# Altium PCB nanobase1.PcbDoc
Units mil, origin at the board's own origin, x right, y up, seen from the top; angles counter-clockwise.
Board outline 2320.85 x 1116.57 mil, 2 copper layers (Top Layer, Bottom Layer); 22 components, 41 nets, 144 pads, 31 vias.
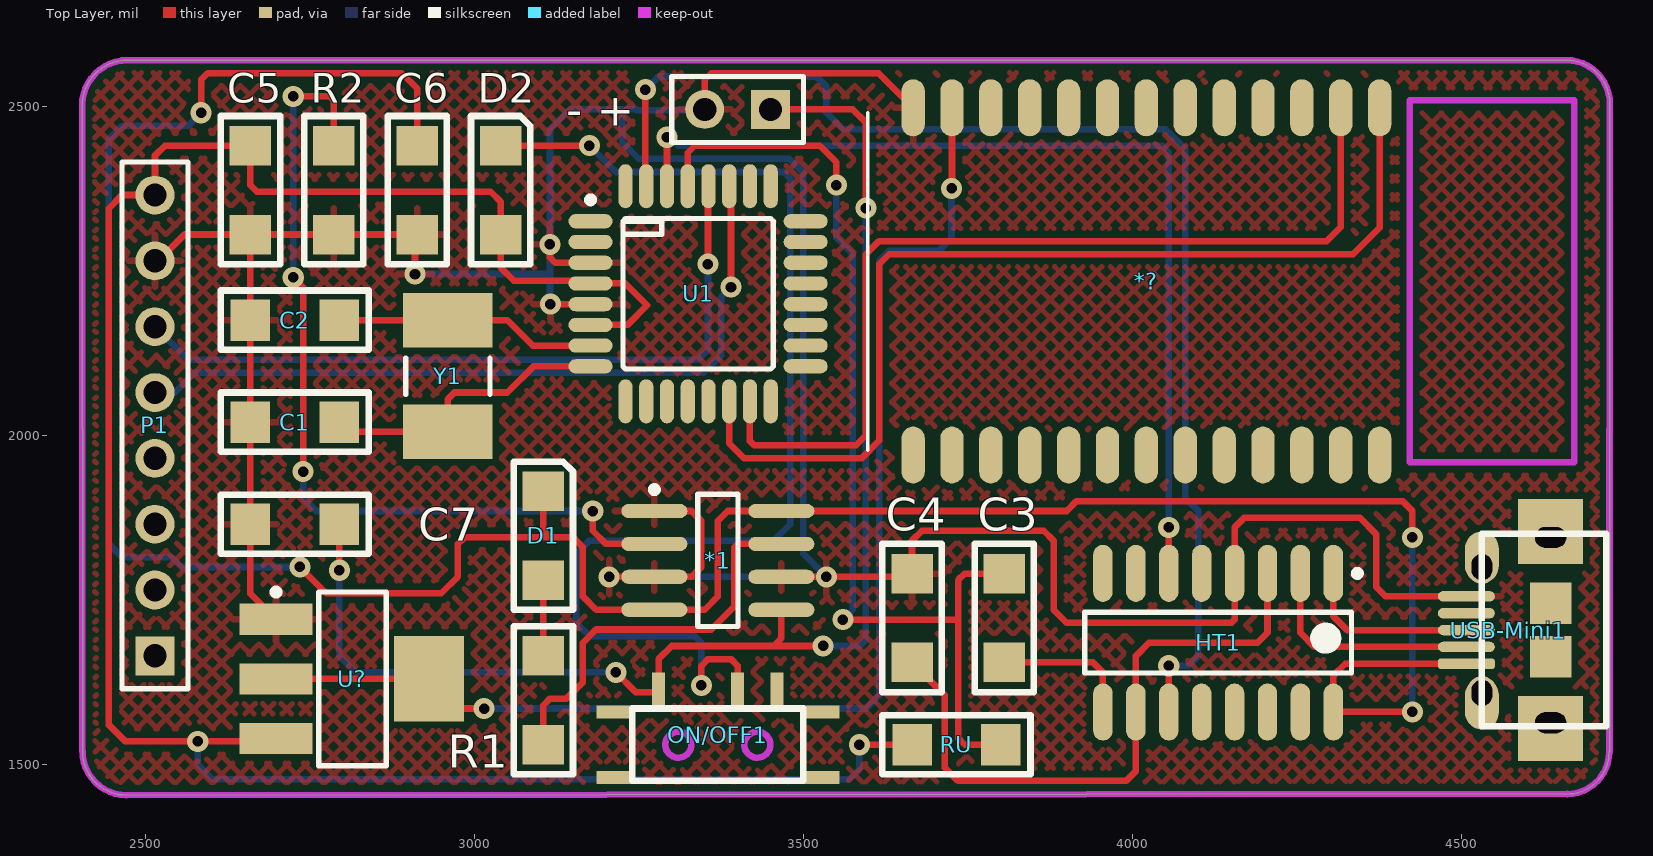
[diagram p0: Top Layer view]
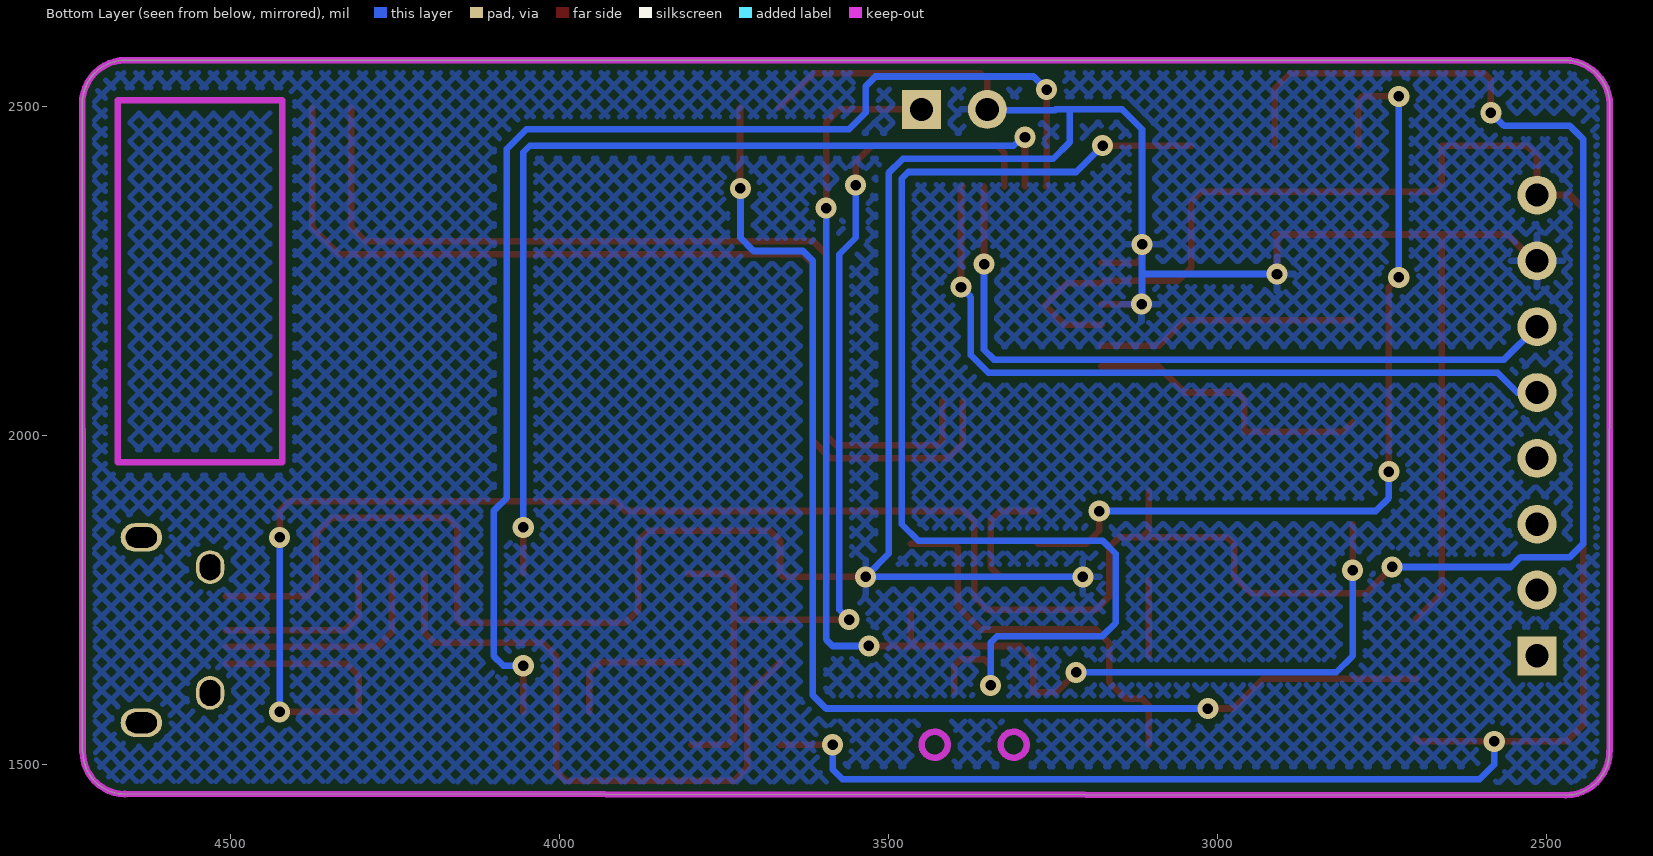
[diagram p1: Bottom Layer view, seen from below]
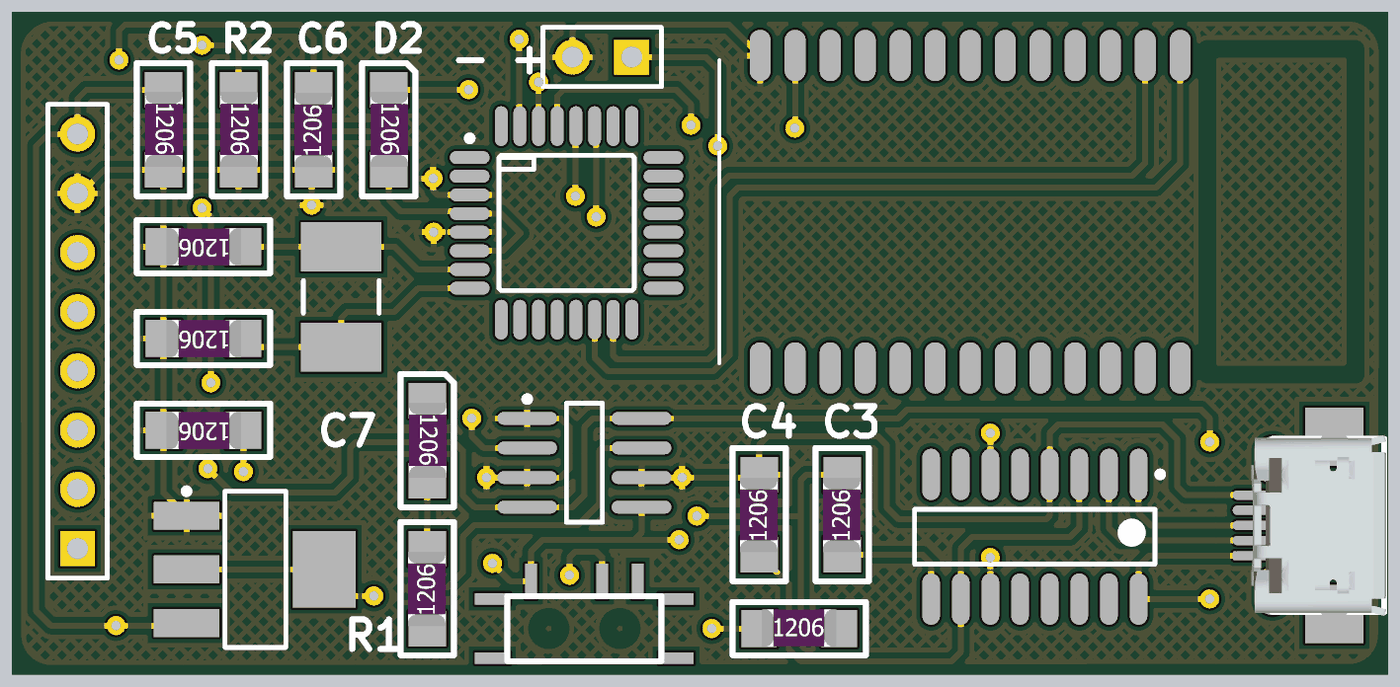
[diagram p2: 3D render of the assembled board from above, using the file's embedded part models]

## Layer stack, top to bottom
Top Solder: solder mask 0.4, Solder Resist, Dk 3.5
Top Layer: signal copper 1.4
Dielectric 1: dielectric 12.6, FR-4, Dk 4.8
Bottom Layer: signal copper 1.4
Bottom Solder: solder mask 0.4, Solder Resist, Dk 3.5

## Board outline
2405,1520 ccw(c2471.45,1519.88) 2471.33,1453.43 4660,1455.41 4660,1455 ccw(c4659.88,1518.96) 4723.84,1519.08 4724.48,1519.08 4725.11,2503.51 4725.11,2503.43 ccw(c4658.66,2503.55) 4658.78,2570 2473.8,2570 2473.67,2570 ccw(c2473.8,2500.46) 2404.26,2500.33 2404.26,2500.42

## Design rules (kind name [scope] priority, off if disabled: settings)
Clearance [All] p1: gap=10 ignorepadtopadclearanceinfootprint=FALSE except(0: Arc-Hole Track-Hole SMDPad-Hole THPad-Hole Via-Hole Fill-Hole Poly-Hole Region-Hole Text-Hole)
PolygonConnect [All] p1: connectstyle=Relief reliefconductorwidth=10 reliefentries=4 polygonreliefangle="90 Angle" airgapwidth=10
RoutingVias [All] p1: holewidth=28 width=50 viastyle="Through Hole" minholewidth=28 minwidth=50 maxholewidth=28 maxwidth=50
SolderMaskExpansion [All] p1: expansion=4
Width [All] p1: maxlimit=10 minlimit=10 preferedwidth=10
30 further rules are at their usual default settings.

## Components (designator, comment, footprint, x,y, rotation, side; value= is the part's Value field where it differs from the comment)
*1 "TP4056" SOP_8 3370,1810 r0 top
*? "HC05" "HC-05 天线" 4035.94,2213.78 r180 top
"- +" "Battery" HDR1X2 3450,2495 r180 top (schematic designator BT1)
C1 "Cap" 1206z 2795,2020 r180 top value=20p
C2 "Cap" 1206z 2795,2175 r180 top value=20p
C3 "Cap" 1206z 3805,1655 r90 top value=100nF
C4 "Cap" 1206z 3665,1655 r90 top value=0.1uf
C5 "Cap" 1206z 2660,2440 r270 top value=100pF
C6 "Cap" 1206z 2913.33,2305 r90 top value=10uf
C7 "Cap" 1206z 2795,1865 r180 top value=10uf
D1 "LED" 1206_极性 3105,1915 r270 top
D2 "Diode" 1206_极性 3040,2440 r270 top
HT1 "HT42B534-16" SOP_16 4130,1685 r270 top
ON/OFF1 "POWER" Switch1 3290,1575 r90 top
P1 "MPU6050" HDR1X8 2515,1665 r90 top
R1 "Resistor" 1206z 3105,1530 r90 top value=1K9
R2 "Resistor" 1206z 2786.67,2440 r270 top value=2K
RU "RES" 1206z 3665,1530 r0 top (schematic designator RU1)
U1 "ATMEGA328P" TQFP_32_短PIN 3340,2215 r0 top
U? "AMS1117" SOT_223 2815,1630 r0 top
USB-Mini1 "J2" USB-MicroDIP4 4625.16,1704.15 r90 top
Y1 "XTAL" XTAL_5032_2PIN 2960,2090 r270 top

## Footprints (in the part's own frame and the unit in brackets; to place one, negate y for a bottom-side part, rotate by r counter-clockwise, add the part's x,y. Pads: shape width x height; smd on the part's side, far side on the other; paste and mask are expansions set on the pad)
1206_极性 [mil]
  rect 60x63 smd: 1(0,0) 2(135,0)
  silkscreen extent -45,-45 180,45, body extent 4,-31 130,32, height 23
1206z [mil]
  rect 60x63 smd: 1(0,0) 2(135,0)
  silkscreen extent -45,-45 180,45, body extent 4,-31 130,32, height 23
"HC-05 天线" [mm]
  oval 0.9x2.2 smd: 1(-8.619,-7.208) 2(-7.119,-7.208) 3(-5.619,-7.208) 4(-4.119,-7.208) 5(-2.619,-7.208) 6(-1.119,-7.208) 7(0.381,-7.208) 8(1.881,-7.208) 9(3.381,-7.208) 10(4.881,-7.208) 11(6.381,-7.208) 12(7.881,-7.208) 13(9.381,-7.208) 22(9.381,6.192) 23(7.881,6.192) 24(6.381,6.192) 25(4.881,6.192) 26(3.381,6.192) 27(1.881,6.192) 28(0.381,6.192) 29(-1.119,6.192) 30(-2.619,6.192) 31(-4.119,6.192) 32(-5.619,6.192) 33(-7.119,6.192) 34(-8.619,6.192)
  Keep-Out Layer lines w0.254: -9.779,6.477 -9.779,-7.493 -16.129,-7.493 -16.129,6.477 -9.779,6.477
  silkscreen extent 11.13,-7.01 11.13,5.99
HDR1X2 [mm] "Connector; Header; 2 Position"
  rect 1.5x1.5 hole 0.9: 1(0,0)
  round 1.5 hole 0.9: 2(2.54,0)
  silkscreen extent -1.27,-1.27 3.81,1.27
HDR1X8 [mm] "Connector; Header; 8 Position"
  rect 1.5x1.5 hole 0.9: 1(0,0)
  round 1.5 hole 0.9: 2(2.54,0) 3(5.08,0) 4(7.62,0) 5(10.16,0) 6(12.7,0) 7(15.24,0) 8(17.78,0)
  silkscreen extent -1.27,-1.27 19.05,1.27
SOP_8 [mm]
  oval 2.55x0.55 smd: 1(-2.45,1.905) 2(-2.45,0.635) 3(-2.45,-0.635) 4(-2.45,-1.905) 5(2.45,-1.905) 6(2.45,-0.635) 7(2.45,0.635) 8(2.45,1.905)
  silkscreen extent -2.57,-2.55 0.77,2.85, body extent -2,-2.55 2,2.55, height 1.75
SOP_16 [mm] "SOP 16"
  oval 2.2x0.75 smd: 1(-2.675,4.445) 2(-2.675,3.175) 3(-2.675,1.905) 4(-2.675,0.635) 5(-2.675,-0.635) 6(-2.675,-1.905) 7(-2.675,-3.175) 8(-2.675,-4.445) 9(2.675,-4.445) 10(2.675,-3.175) 11(2.675,-1.905) 12(2.675,-0.635) 13(2.675,0.635) 14(2.675,1.905) 15(2.675,3.175) 16(2.675,4.445)
  silkscreen extent -2.8,-5.15 1.17,5.5, body extent -2.1,-5.15 2.1,5.15, height 1.7
SOT_223 [mm] "SOT223, 4-Leads, Body 6.50x7.00mm (avg), Pitch 2.30mm, IPC Low Density"
  rect 2.8x1.2 smd: 1(-2.95,2.3) 2(-2.95,0) 3(-2.95,-2.3)
  rect 2.7x3.3 smd: 2(2.95,0)
  silkscreen extent -3.07,-3.35 1.3,3.47, body extent -1.85,-3.35 1.85,3.35, height 1.8
Switch1 [mm]
  rect 1.5x0.5 smd: 1(0.889,0.254) 2(0.889,-2.794) 3(0.889,-4.318)
  rect 0.5x1.5 smd: 10(-2.413,1.905) 10(-2.413,-5.969) 10(0.127,1.905) 10(0.127,-5.969)
  silkscreen extent -2.54,-5.33 0.25,1.27
TQFP_32_短PIN [mm]
  oval 1.7x0.55 smd: 1(-4.15,2.8) 2(-4.15,2) 3(-4.15,1.2) 4(-4.15,0.4) 5(-4.15,-0.4) 6(-4.15,-1.2) 7(-4.15,-2) 8(-4.15,-2.8) 17(4.15,-2.8) 18(4.15,-2) 19(4.15,-1.2) 20(4.15,-0.4) 21(4.15,0.4) 22(4.15,1.2) 23(4.15,2) 24(4.15,2.8)
  oval 0.55x1.7 smd: 9(-2.8,-4.15) 10(-2,-4.15) 11(-1.2,-4.15) 12(-0.4,-4.15) 13(0.4,-4.15) 14(1.2,-4.15) 15(2,-4.15) 16(2.8,-4.15) 25(2.8,4.15) 26(2,4.15) 27(1.2,4.15) 28(0.4,4.15) 29(-0.4,4.15) 30(-1.2,4.15) 31(-2,4.15) 32(-2.8,4.15)
  silkscreen extent -4.27,-2.9 2.9,3.75, body extent -3.5,-3.5 3.5,3.5, height 1.2
USB-MicroDIP4 [mm] "Micro-USB 5P 卧式直插"
  rect 2.5x2.5 smd: 0(-3.8,-0.25) 6(3.8,-0.25)
  oval 1.1x1.6 hole 0.8 slot 1.2 at 90 deg: 0(-3.575,-0.25) 0(3.575,-0.25)
  oval 2x1.3 smd: 0(-2.84,2.4) 0(2.81,2.4)
  oval 1.3x1.1 hole 0.8 slot 1 at 0 deg: 0(-2.425,2.4) 0(2.427,2.4)
  rect 1.6x1.6 smd: 0(-1.038,-0.25) 0(1.038,-0.25)
  rrect50% 0.4x2.2 smd: 1(-1.3,3)
  oval 0.4x2.2 smd: 2(-0.65,3) 3(0,3) 4(0.65,3) 5(1.3,3)
  silkscreen extent -3.71,-2.4 3.71,2.4, body extent -3.89,-2.48 3.89,3.36, height 2.6
XTAL_5032_2PIN [mm] "5032_CPX_53GB"
  rect 2.1x3.45 smd: 1(-2.15,0) 2(2.15,0)
  silkscreen extent -0.7,-1.63 0.7,1.63, body extent -2.58,-1.68 2.57,1.68, height 1.25

## Part data
"- +": "电池", LatestRevisionDate=17-Jul-2002, LatestRevisionNote="Re-released for DXP Platform.", PackageDescription="Battery; 2 Leads", PackageReference=BAT-2, Published=24-Mar-1999, Publisher="Altium Limited"
C1 C2 C3 C4 C5: "Capacitor", LatestRevisionDate=17-Jul-2002, LatestRevisionNote="Re-released for DXP Platform.", PackageReference=RAD-0.3, Published=8-Jun-2000, Publisher="Altium Limited"
C6 C7: "电容", LatestRevisionDate=17-Jul-2002, LatestRevisionNote="Re-released for DXP Platform.", PackageDescription="Radial Cap, Thru-Hole; 2 Leads; 0.3 in Pin Spacing", PackageReference=RAD-0.3, Published=8-Jun-2000, Publisher="Altium Limited"
D1 D2: "二极管", Published=8-Jun-2000, Publisher="Altium Limited"
  D1: LatestRevisionDate=08-Jul-2005, LatestRevisionNote="Mech Layer 1 removed.", PackageDescription="LED; 2 Leads", PackageReference=LED-1
  D2: Code_JEDEC=DO-214-AB, LatestRevisionDate=17-Jul-2002, LatestRevisionNote="Re-released for DXP Platform.", PackageDescription="DO-214-AB/SMC; 2 C-Bend Leads; Body 7.9 x 5.9 mm, inc. leads (LxW)", PackageReference=SMC, PackageVersion=Sep-1996
HT1: "USB_COM"
ON/OFF1: library part SW2_1, "按键", LatestRevisionDate=17-Jul-2002, LatestRevisionNote="Re-released for DXP Platform.", PackageDescription="Switch; 2 Leads", PackageReference=SPST-2, Published=24-Mar-1999, Publisher="Altium Limited"
P1: library part "Header 8", "Header, 8-Pin", LatestRevisionDate=17-Jul-2002, LatestRevisionNote="Re-released for DXP Platform.", Publisher="Altium Limited"
R1 R2: "电阻", LatestRevisionDate=17-Jul-2002, LatestRevisionNote="Re-released for DXP Platform.", PackageDescription="Axial Device, Thru-Hole; 2 Leads; 0.3 in Pin Spacing", PackageReference=AXIAL-0.3, Published=8-Jun-2000, Publisher="Altium Limited"
RU: library part RES-8P4R
U1: library part atmega328p-au
U?: "稳压"
USB-Mini1: library part USB_MINI
Y1: "Crystal Oscillator", LatestRevisionDate=17-Jul-2002, LatestRevisionNote="Re-released for DXP Platform.", PackageReference=R38, Published=8-Jun-2000, Publisher="Altium Limited"

## Via types
v1: diameter 32, hole 16, Top Layer to Bottom Layer, 31 vias

## Nets (pads, with @x,y where several pads share a name; then routed paths per layer and width w, separated by ;. In a path a pad name is that pad's centre, name@x,y a point inside that pad or via, vN(x,y) a via of type N, cw(c..) or ccw(c..) an arc to the next point about the centre after c; other vN are vias at no path point)
3V3: *?.12 U?.2 | length 1925.8
  Top Layer w10: U?.2@2698.86,1630 2931.14,1630 2976.14,1585 v1(3015,1585) ; v1@3725.67,2374.33 *?.12
  Bottom Layer w10: v1(3015,1585) 3595,1585 3615,1605 3615,2265 3630,2280 3705,2280 3725,2300 v1(3725,2375)
A0: U1.23
A1: U1.24
A2: U1.25
A3: U1.26
A4: P1.5 U1.27 | length 1147.5
  Top Layer w10: U1.27 3390,2375.63 v1(3390,2225)
  Bottom Layer w10: P1.5 2545,2065 2575,2095 3348.28,2095 3375,2121.72 3375,2210 v1(3390,2225)
A5: P1.6 U1.28 | length 1115.6
  Top Layer w10: v1(3355,2260) 3355,2377.64 U1.28
  Bottom Layer w10: P1.6 2565,2115 3340,2115 3355,2130 v1(3355,2260)
A6: U1.19
A7: U1.22
D2: U1.32
D3: U1.1
D4: U1.2
D5: U1.9
D6: U1.10
D7: U1.11
D8: U1.12
D9: U1.13
D10_RX: *?.1 U1.14 | length 1545.8
  Top Layer w10: U1.14 3387.24,1987.76 3410,1965 3588.28,1965 3615,1991.72 3615,2260 3630,2275 4335,2275 4375.28,2315.28 *?.1
D11_TX: *?.2 U1.15 | length 1440.1
  Top Layer w10: U1.15 3418.74,1991.26 3425,1985 3580,1985 3595,2000 3595,2275 3615,2295 4295,2295 4316.22,2316.22 *?.2
D12: U1.16
D13: U1.17
DTR: C3.1 HT1.9 | length 216.5
  Top Layer w10: C3.1 3940,1655 3955,1640 HT1.9
GND: "- +.2" *1.1 *1.3 *1.6 *?.13 C1.2 C2.2 C4.2 C5.2 C6.1 C7.2 HT1.4 P1.7 R2.2 U1.3 U1.5 U?.1 USB-Mini1.5 | length 5388.4
  Top Layer w10: P1.7 2520,2265 2560,2305 C5.2 ; U?.1 2660,1759.41 C7.2 C1.2 C2.2 C5.2 ; v1(2910,2245) 2910,2301.67 C6.1 R2.2 C5.2 ; v1(3115,2290) 3115,2270 3122.76,2262.24 U1.3 ; v1(3115.75,2199.25) U1.5 ; v1(3205,1785) *1.3 3330,1785 3345,1800 3345,1870 3330,1885 *1.1 ; 3350,2495 3350,2540 3360,2550 3614.17,2550 *?.13 ; *1.6 v1(3535,1785) 3660,1785 C4.2 3665,1840 3680,1855 3865,1855 3880,1840 3880,1735 3900,1715 4150,1715 4155,1720 HT1.4 4155,1860 4170,1875 4345,1875 4370,1850 4370,1770 4384.67,1755.33 USB-Mini1.5
  Bottom Layer w10: v1(2910,2245) 3115,2245 ; v1(3115.75,2199.25) 3115,2200 3115,2245 ; v1(3205,1785) v1(3535,1785) 3500,1820 3500,2398.28 3478.28,2420 3250,2420 3225,2445 3225,2495 ; 3350,2495 3349,2494 3247.16,2494 3246.16,2495 3225,2495 ; 3115,2245 v1(3115,2290) 3115,2465 3145,2495 3225,2495
Net*1_2: *1.2 R2.1 | length 1329.1
  Top Layer w10: v1(2725,2240) 2740,2225 v1(2740,1945) ; v1(2725,2515) 2780,2515 2786.67,2508.33 R2.1 ; v1(3180,1885) 3180,1855 3200,1835 *1.2
  Bottom Layer w10: v1(2725,2240) v1(2725,2515) ; v1(2740,1945) 2740,1905 2760,1885 v1(3180,1885)
Net*1_5: "- +.1" *1.5 C7.1 ON/OFF1.1 | length 2083.2
  Top Layer w10: v1(2795,1795) C7.1 ; v1(3215,1640) 3245,1610 ON/OFF1.1 3280,1660 3300,1680 3455,1680 ; 3450,2495 3575,2495 3595,2475 v1(3595,2345) ; *1.5 3466.46,1691.46 3455,1680 ; v1(3530,1680) 3455,1680
  Bottom Layer w10: v1(2795,1795) 2795,1665 2820,1640 v1(3215,1640) ; v1(3530,1680) 3585,1680 3595,1690 v1(3595,2345)
Net*1_7: *1.7 R1.1 | length 610.8
  Top Layer w10: R1.1 3105,1590 3115,1600 3140,1600 3165,1625 3165,1685 3185,1705 3360,1705 3395,1740 3395,1830 3400,1835 *1.7
NetC1_1: C1.1 U1.8 Y1.2 | length 457.9
  Top Layer w10: C1.1 2809.65,2005.35 Y1.2 2960,2055 2970,2065 3050,2065 3089.76,2104.76 U1.8
NetC2_1: C2.1 U1.7 Y1.1 | length 397.7
  Top Layer w10: C2.1 2795.35,2174.65 Y1.1 3050.35,2174.65 3088.74,2136.26 U1.7
NetC4_1: C4.1 HT1.3 HT1.10 | length 965
  Top Layer w10: C4.1 3715,1605 3715,1495 3735,1475 3990,1475 4005,1490 HT1.10 4005,1665 4025,1685 4190,1685 4205,1700 HT1.3
NetD1_2: D1.2 R1.2 | length 115
  Top Layer w10: R1.2 D1.2
NetD2_1: D2.1 ON/OFF1.2 | length 1835.1
  Top Layer w10: D2.1 v1(3175,2440) ; v1(3345,1620) 3345,1650 3355,1660 3390,1660 3400,1650 ON/OFF1.2
  Bottom Layer w10: v1(3175,2440) 3215,2400 3470,2400 3480,2390 3480,1865 3455,1840 3175,1840 3155,1820 3155,1715 3175,1695 3335,1695 3345,1685 v1(3345,1620)
NetHT1_1: HT1.1 USB-Mini1.3 | length 276
  Top Layer w10: HT1.1 4305,1725 4325.85,1704.15 USB-Mini1.3
NetHT1_2: HT1.2 USB-Mini1.2 | length 351.2
  Top Layer w10: HT1.2 4255,1700 4276.44,1678.56 USB-Mini1.2
RESET: C3.2 RU.2 U1.29 | length 1561.3
  Top Layer w10: U1.29 3324.25,2429.25 3335,2440 3525,2440 3550,2415 v1(3550,2380) ; v1(3560,1720) 3735,1720 ; RU.2 3745,1530 3735,1540 3735,1720 ; C3.2 3745,1790 3735,1780 3735,1720
  Bottom Layer w10: v1(3550,2380) 3550,2300 3575,2275 3575,1735 v1(3560,1720)
RXD: HT1.6 U1.30 | length 1485.7
  Top Layer w10: U1.30 v1(3292.76,2452.76) ; HT1.6 v1(4055,1860)
  Bottom Layer w10: v1(3292.76,2452.76) 3297.24,2452.76 3310,2440 4045,2440 4055,2430 v1(4055,1860)
SWC: U1.18
SWD: U1.21
TXD: HT1.11 U1.31 | length 1944.2
  Top Layer w10: v1(3260,2525) 3260,2379.65 U1.31 ; HT1.11 v1(4055,1650)
  Bottom Layer w10: v1(3260,2525) 3280,2545 3520,2545 3535,2530 3535,2490 3560,2465 4050,2465 4080,2435 4080,1905 4100,1885 4100,1665 4085,1650 v1(4055,1650)
USBLED: HT1.8
UVCC: *1.4 *1.8 C6.2 D1.1 HT1.16 USB-Mini1.1 | length 4321.4
  Top Layer w10: v1(2585,2490) 2585,2540 2595,2550 2890,2550 2913.33,2526.67 C6.2 ; v1(2735,1800) 2775,1760 2950,1760 2975,1785 2975,1835 2985,1845 3115,1845 ; D1.1 3105,1855 3115,1845 ; v1(4425,1580) 4305.31,1580 HT1.16 4305,1635 4322.97,1652.97 USB-Mini1.1 ; v1(4425,1845) 4425,1885 4410,1900 3915,1900 3900,1885 *1.8 3385,1885 3370,1870 3370,1755 3350,1735 *1.4 3185,1735 3165,1755 3165,1830 3150,1845 3115,1845
  Bottom Layer w10: v1(2585,2490) 2565,2470 2465,2470 2445,2450 2445,1835 2465,1815 2540,1815 2555,1800 v1(2735,1800) ; v1(4425,1580) v1(4425,1845)
VCC: C5.1 D2.2 P1.8 RU.1 U1.4 U1.6 U?.3 | length 3408.2
  Top Layer w10: U?.3 2694.41,1535 v1(2580,1535) 2470,1535 2445,1560 2445,2345 2465,2365 P1.8 2515,2425 2530,2440 C5.1 2660,2380 2670,2370 3025,2370 3040,2355 D2.2 3040,2255 3060,2235 3172.36,2235 U1.4 3229.25,2230.75 3262.5,2197.5 3232.76,2167.76 U1.6 ; v1(3585,1530) RU.1
  Bottom Layer w10: v1(2580,1535) 2580,1500 2602.34,1477.66 3570,1477.66 3585,1492.66 v1(3585,1530)
pads on no net: *?.3 *?.4 *?.5 *?.6 *?.7 *?.8 *?.9 *?.10 *?.11 *?.22 *?.23 *?.24 *?.25 *?.26 *?.27 *?.28 *?.29 *?.30 *?.31 *?.32 *?.33 *?.34 HT1.5 HT1.7 HT1.12 HT1.13 HT1.14 HT1.15 ON/OFF1.3 ON/OFF1.10 P1.1 P1.2 P1.3 P1.4 U1.20 USB-Mini1.0 USB-Mini1.4 USB-Mini1.6

## Polygon pours and split planes (outlines as drawn)
GND on Bottom Layer "Top Layer-No Net1" (hatched 45Degree grid 20 track 8, pour order 2): 2405,1520 ccw(c2471.45,1519.88) 2471.33,1453.43 4660,1455.41 4660,1455 ccw(c4659.88,1518.96) 4723.84,1519.08 4724.48,1519.08 4725.11,2503.51 4725.11,2503.43 ccw(c4658.66,2503.55) 4658.78,2570 2473.8,2570 2473.67,2570 ccw(c2473.8,2500.46) 2404.26,2500.33 2404.26,2500.42
GND on Top Layer "Top Layer-No Net" (hatched 45Degree grid 20 track 8, pour order 1): 2405,1520 ccw(c2471.45,1519.88) 2471.33,1453.43 4660,1455.41 4660,1455 ccw(c4659.88,1518.96) 4723.84,1519.08 4724.48,1519.08 4725.11,2503.51 4725.11,2503.43 ccw(c4658.66,2503.55) 4658.78,2570 2473.8,2570 2473.67,2570 ccw(c2473.8,2500.46) 2404.26,2500.33 2404.26,2500.42

## Keep-outs
Keep-Out Layer:
  circle w10: c3310,1530 r19.68
  circle w10: c3430,1530 r19.68
  lines w10: 2404.26,2500.33 cw(c2473.8,2500.46) 2473.67,2570 ; 2404.26,2500.42 2404.81,1520 ; 2405,1520 ccw(c2471.45,1519.88) 2471.33,1453.43 4660,1455.41 ; 2473.8,2570 4658.78,2570 cw(c4658.66,2503.55) 4725.11,2503.43 ; 4660,1455 ccw(c4659.88,1518.96) 4723.84,1519.08 ; 4724.48,1519.08 4725.11,2503.51